# Allegro board unnamed.brd
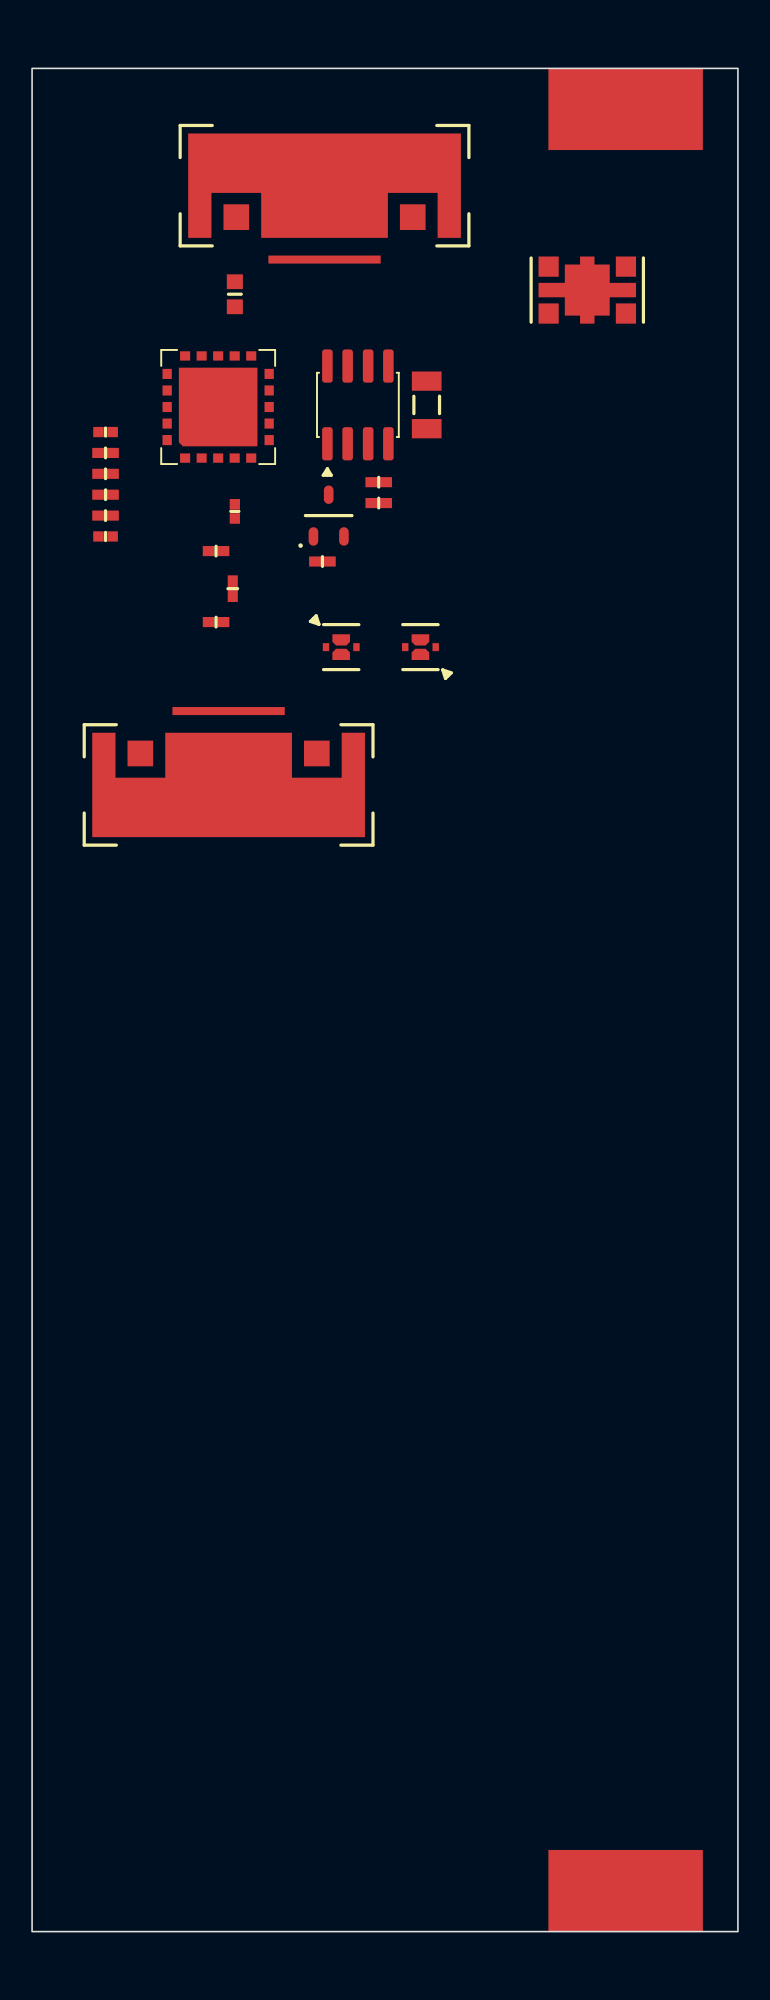
[diagram p0: board, top side]
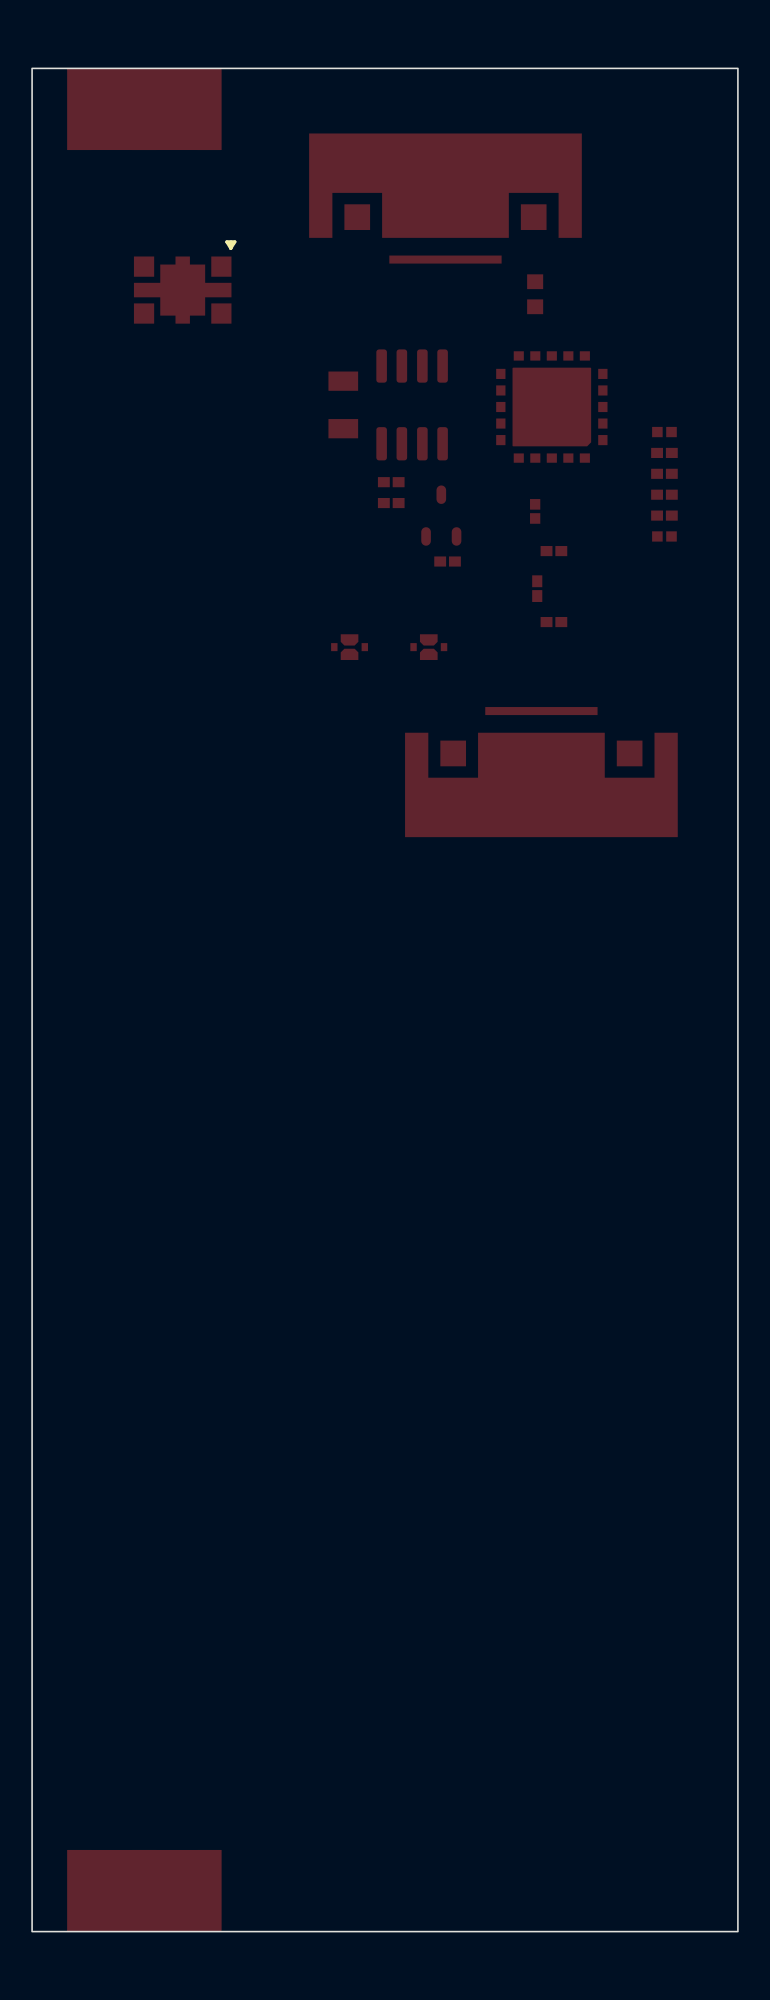
[diagram p1: board, bottom side, seen from below]

Outline 44 x 116 mm; copper layers: TOP, GND02, ART03, BOTTOM. Coordinates in mm from the lower left corner of the outline.
Outline path: rectangle 0,0 44,116

## Design rules (mm)
constraint set DEFAULT: min track width 0.13

## Placement (name value [footprint] x y rotation side)
C19  22p  [CAPC1608X97N]  12.64 101.94 90 top
C21  10u  [CAPC3216X170N]  24.6 95.05 90 top
C22  4.7u  [CAPC1005X60N]  4.58 93.36 180 top
C23  4.7u  [CAPC1005X60N]  4.58 86.86 180 top
C41  18p  [CAPC1005X60N]  12.64 88.42 90 top
CP1  30dB  [YANTEL_DC30F30]  34.61 102.2 0 top
F2  3300M  [JIAXINGGLEAD_DFN3300S100HC]  12.25 71.39 0 top
F3  3300M  [JIAXINGGLEAD_DFN3300S100HC]  18.23 108.7 180 top
J1  SMA  [SMA-KHD72]  37 0 0 top
J2  SMA  [SMA-KHD72]  37 116 180 top
J10  IPEX_W_SWITCH  [MURATA_MM8030_2610]  24.21 79.97 270 top
J11  IPEX_W_SWITCH  [MURATA_MM8030_2610]  19.27 79.97 90 top
Q1  55P05  [SOIC8P127_490X600X175L83X42N_Q1]  20.31 95.05 0 top
Q2  3904  [SOT95P280X120-3N]  18.49 88.16 270 top
R9  33.2K  [RESC1006X63N]  21.61 90.24 0 top
R12  33.2K  [RESC1006X63N]  21.61 88.94 180 top
R13  1K  [RESC1006X63N]  18.1 85.3 180 top
R22  21K  [RESC1006X63N]  4.58 92.06 180 top
R23  29.4K  [RESC1006X63N]  4.58 90.76 0 top
R24  34.8K  [RESC1006X63N]  4.58 89.46 0 top
R25  15.4K  [RESC1006X63N]  4.58 88.16 180 top
R26  TBD  [RESC1006X63N]  12.51 83.61 90 top
R27  TBD  [RESC1006X63N]  11.47 81.53 180 top
R28  TBD  [RESC1006X63N]  11.47 85.95 180 top
U5  BLM9D3336-14AM  [PQFN21P103_700X700X108L42X50T490N_Q2]  11.6 94.92 90 top

## Library data of the parts
C19 C21-C23 C41 = CAP_NP
CP1 = Coupler_1in2T3iso4cou5gnd
F2 F3 = BPF_4p_InOutGndGnd
J1 J2 = MMCX
J10 J11 = IPEX_W_SWITCH
Q1 = MOS_E-mode_P-Ch_SO8
Q2 = BJT-NPN-BEC
R9 R12 R13 R22-R28 = RES
U5 = BLM9D3336-14AM

## Footprints (pads in the part's own frame, mm; a bottom-side part is the same pattern mirrored in y, then rotated)
CAPC1005X60N
  rect 0.66x0.64 smd: 1(-0.44,0) 2(0.44,0)
CAPC1608X97N
  rect 0.92x1 smd: 1(-0.78,0) 2(0.78,0)
CAPC3216X170N
  rect 1.2x1.85 smd: 1(-1.48,0) 2(1.48,0)
JIAXINGGLEAD_DFN3300S100HC
  rect 1.6x1.6 smd: 1(-5.5,1.96) 2(5.5,1.96)
  custom 17x6.5 smd: 3(0,0)
  rect 7x0.5 smd: 4(0,4.6)
MURATA_MM8030_2610
  rect 0.5x0.4 smd: 1(0,0.95) 2(0,-0.95)
  custom 0.7x1.1 smd: 3(0.45,0) 4(-0.45,0)
PQFN21P103_700X700X108L42X50T490N_Q2
  rect 0.58x0.63 smd: 1(-3.18,2.06) 2(-3.18,1.03) 3(-3.18,0) 4(-3.18,-1.03) 5(-3.18,-2.06) 11(3.18,-2.06) 12(3.18,-1.03) 13(3.18,0) 14(3.18,1.03) 15(3.18,2.06)
  rect 0.63x0.58 smd: 6(-2.06,-3.18) 7(-1.03,-3.18) 8(0,-3.18) 9(1.03,-3.18) 10(2.06,-3.18) 16(2.06,3.18) 17(1.03,3.18) 18(0,3.18) 19(-1.03,3.18) 20(-2.06,3.18)
  custom 4.9x4.9 smd: 21(0,0)
RESC1006X63N
  rect 0.74x0.63 smd: 1(-0.46,0) 2(0.46,0)
SMA-KHD72
  rect 1.52x5.08 smd: 1(0,2.54)
  rect 9.6x5.08 smd: 2(0,2.54)
SOIC8P127_490X600X175L83X42N_Q1
  rrect 0.66x2.07 smd: 1(-1.9,-2.42) 2(-0.64,-2.42) 3(0.64,-2.42) 4(1.9,-2.42) 5(1.9,2.42) 6(0.64,2.42) 7(-0.64,2.42) 8(-1.9,2.42)
SOT95P280X120-3N
  oval 1.15x0.6 smd: 1(1.3,-0.95) 2(1.3,0.95) 3(-1.3,0)
YANTEL_DC30F30
  rect 1.26x1.26 smd: 1(-2.41,1.46) 2(2.41,1.46) 3(-2.41,-1.46) 4(2.41,-1.46)
  custom 6.08x4.18 smd: 5(0,0)

## Nets
GND_SIGNAL: C21.2 C22.2 C23.2 CP1.5 F2.3 F2.4 F3.3 F3.4 J1.2(OUTER) J2.2(OUTER) J10.3 J10.4 J11.3 J11.4 Q2.2(E) R22.2 R25.2 R27.2 R28.2 U5.2 U5.3 U5.5 U5.6 U5.8 U5.10 U5.11 U5.13 U5.14 U5.15 U5.16 U5.17 U5.18 U5.21
VCC_HV: C21.1 Q1.1 Q1.2 Q1.3(S#3) R9.1
VCC_TX3: R23.1 R24.1
EN: R13.1
N528667: C41.2 U5.4
N529334: C19.1 U5.12
N529338: C19.2 F3.2(RFOUT)
N530549: Q1.5 Q1.6 Q1.7 Q1.8 U5.7 U5.9 U5.19
N530619: Q1.4 R9.2 R12.1
N530853: Q2.3 R12.2
N531114: Q2.1 R13.2
N531820: C23.1 R24.2 R25.1 U5.1(VGS_P)
N539266: C22.1 R22.1 R23.2 U5.20
N563915: J10.2(OUT) J11.2(OUT)
N563919: F2.2(RFOUT) J11.1
N564561: F2.1 R26.1 R27.1
N564573: C41.1 R26.2 R28.1
N565882: J10.1
N569475: CP1.1 F3.1
N570709: CP1.2 J2.1
N573109: CP1.3
N574273: CP1.4(P4)
N5350030: J1.1

## Copper pours and planes (outline as drawn; the poured copper is in the pictures)
Net_17 on TOP (solid shape): 33.7,110.92 32.2,110.92 32.2,116 33.7,116
Net_18 on TOP (solid shape): 41.8,110.92 40.3,110.92 40.3,116 41.8,116
Net_19 on TOP (solid shape): 41.8,0 40.3,0 40.3,5.08 41.8,5.08
Net_20 on TOP (solid shape): 33.7,0 32.2,0 32.2,5.08 33.7,5.08
